# EAGLE board luxo (EAGLE 7.3.0)
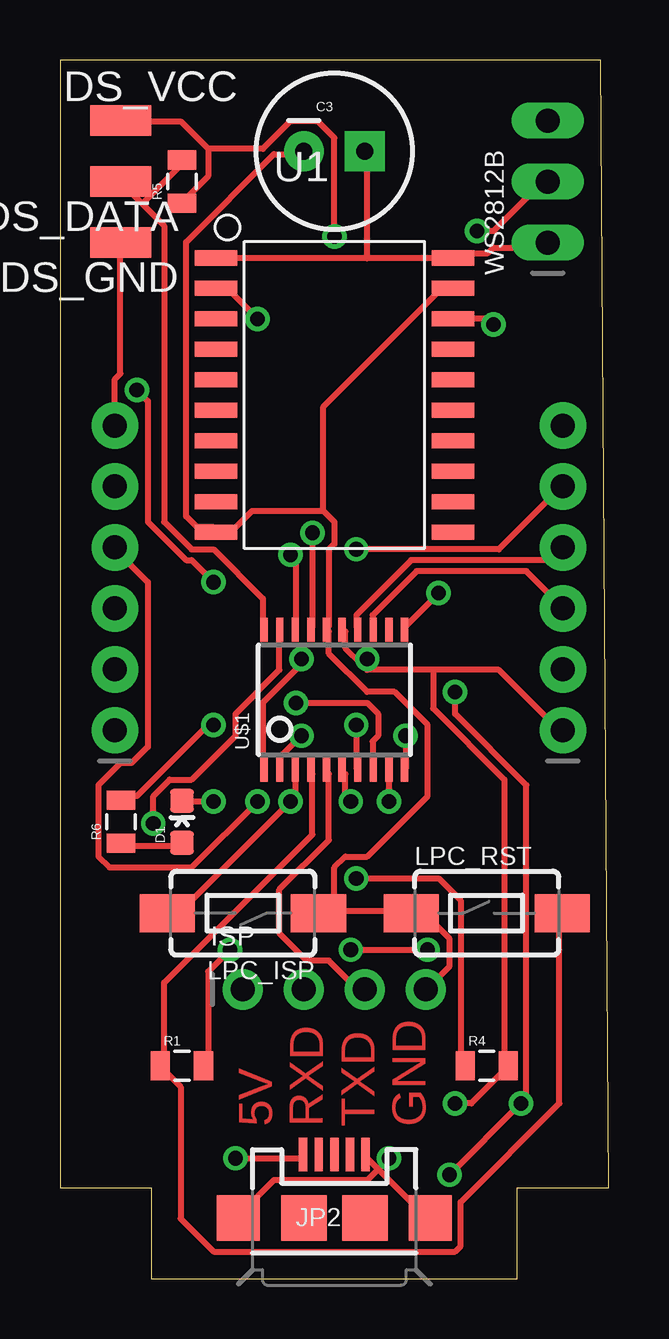
[diagram p0: board, top side]
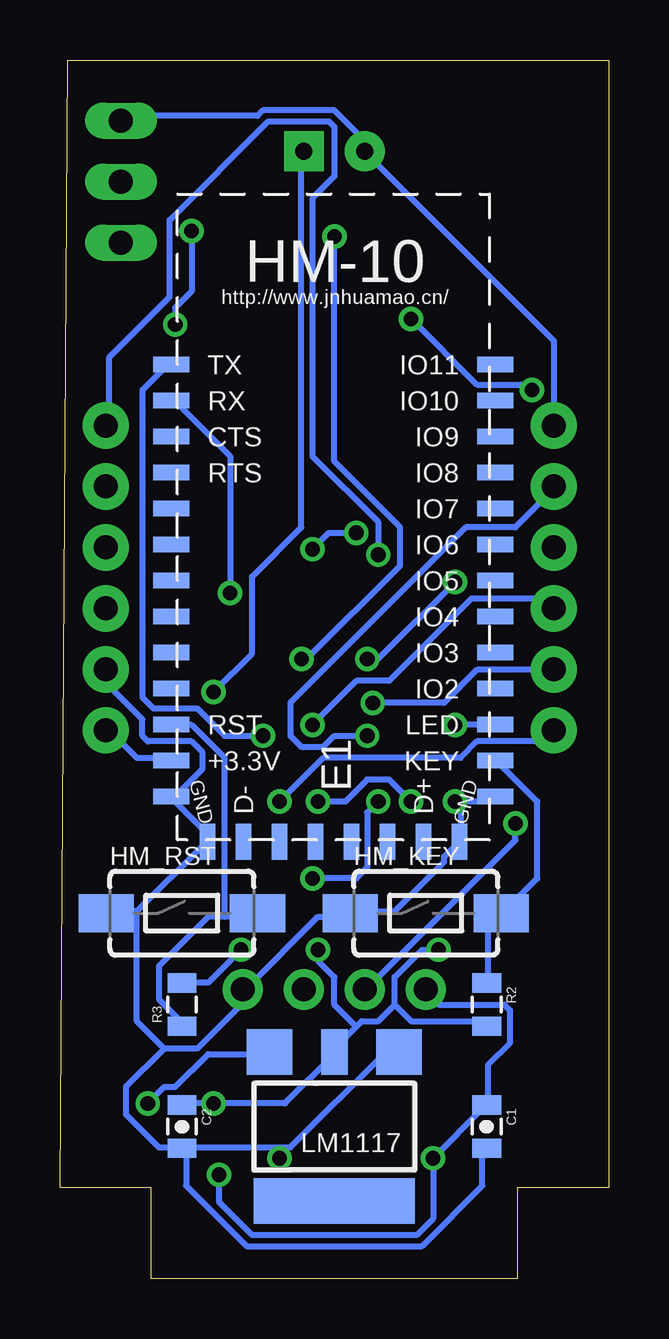
[diagram p1: board, bottom side, seen from below]

Size 22.86 x 50.79 mm. Coordinates in mm from the lower left corner, seen from the top.
Outline: 0,3.81 3.81,3.81 3.81,0 19.05,0 19.05,3.81 22.86,3.81 22.53,50.79 0,50.79 0,3.81
Copper layers (1*16): Top 0.035mm / dielectric 1.5mm / Bottom 0.035mm
Design rules "default": minimum track width 10mil, minimum drill 24mil, track to track 8mil, track to pad 8mil, pad to pad 8mil, via to via 8mil, smd to smd 8mil, copper to edge 40mil, drill to drill 8mil, minimum pad ring 10mil, minimum via ring 8mil, stop-mask expansion 4mil, vias tented up to drill 0mil, thermal gap 10mil

## Footprints (pad centres in the part's own frame; a part is rotated, then mirrored left to right if it is on the bottom)
0805-CAP = smd 0.8 x 1.2: 1 -0.9,0; 2 0.9,0
CPOL-RADIAL-100UF-25V = drill 0.7 pad 1.651 square: 1 1.27,0 | drill 0.7 pad 1.651: 2 -1.27,0
LED-0603 = smd 1 x 1: A 0,-0.877; C 0,0.877
SMD1,27-2,54 = smd 1.27 x 2.54: 1 0,0
26.9X13X2.2_BOARD = smd 1.5 x 0.635: 1 -7.5,0; 2 -7.5,-1.5; 3 -7.5,-3; 4 -7.5,-4.5; 5 -7.5,-6; 6 -7.5,-7.5; 8 -7.5,-10.5; 9 -7.5,-12; 10 -7.5,-13.5; 11 -7.5,-15; 12 -7.5,-16.5; 13 -7.5,-18; 22 6,-18; 23 6,-16.5; 24 6,-15; 25 6,-13.5; 26 6,-12; 27 6,-10.5; 28 6,-9; 29 6,-7.5; 30 6,-6; 31 6,-4.5; 32 6,-3; 33 6,-1.5; 34 6,0; $7 -7.5,-9 | smd 0.635 x 1.5: 14 -6,-19.875; 15 -4.5,-19.875; 16 -3,-19.875; 17 -1.5,-19.875; 18 0,-19.875; 19 1.5,-19.875; 20 3,-19.875; 21 4.5,-19.875
TACTILE-SWITCH-1101NE = smd 2.3 x 1.6: 1 -3.15,0; 2 3.15,0
1X04_ROUND = drill 1 pad 1.676: 1 -3.81,0; 2 -1.27,0; 3 1.27,0; 4 3.81,0
USB-MICROB = smd 0.35 x 1.4: D+ 0,2.65; D- -0.65,2.65; GND 1.3,2.65; ID 0.65,2.65; VBUS -1.3,2.65 | smd 1.8 x 1.9: MT1 -4,0; MT2 4,0 | smd 1.9 x 1.9: P$1 -1.27,0; P$2 1.27,0
1X06_ROUND_76 = drill 1 pad 1.93: 1 -6.35,0; 2 -3.81,0; 3 -1.27,0; 4 1.27,0; 5 3.81,0; 6 6.35,0
SOT223-W = smd 1.9 x 1.9: 1 -2.7,-3.1; 3 2.7,-3.1 | smd 1.1 x 1.9: 2 0,-3.1 | smd 6.7 x 1.9: 4 0,3.1
0805 = smd 0.8 x 1.2: 1 -0.9,0; 2 0.9,0
SOP20-10.65 = smd 0.635 x 1.77: 1 -5.715,-4.94; 2 -4.445,-4.94; 3 -3.175,-4.94; 4 -1.905,-4.94; 5 -0.635,-4.94; 6 0.635,-4.94; 7 1.905,-4.94; 8 3.175,-4.94; 9 4.445,-4.94; 10 5.715,-4.94; 11 5.715,4.94; 12 4.445,4.94; 13 3.175,4.94; 14 1.905,4.94; 15 0.635,4.94; 16 -0.635,4.94; 17 -1.905,4.94; 18 -3.175,4.94; 19 -4.445,4.94; 20 -5.715,4.94
TSSOP20 = smd 0.305 x 0.991: 1 -2.925,-2.918; 2 -2.275,-2.918; 3 -1.625,-2.918; 4 -0.975,-2.918; 5 -0.325,-2.918; 6 0.325,-2.918; 7 0.975,-2.918; 8 1.625,-2.918; 9 2.275,-2.918; 10 2.925,-2.918; 11 2.925,2.918; 12 2.275,2.918; 13 1.625,2.918; 14 0.975,2.918; 15 0.325,2.918; 16 -0.325,2.918; 17 -0.975,2.918; 18 -1.625,2.918; 19 -2.275,2.918; 20 -2.925,2.918
1X03_OVAL = drill 1 long: 1 -2.54,0; 2 0,0; 3 2.54,0

## Placement (x,y rotation side)
C1  10uf  [0805-CAP]  5.08,6.35 270 bottom
C2  10uf  [0805-CAP]  17.78,6.35 270 bottom
C3  100uf  [CPOL-RADIAL-100UF-25V]  11.43,46.99 0 top
D1  BLUE  [LED-0603]  5.08,19.05 0 top
DS_DATA  [SMD1,27-2,54]  2.54,45.72 90 top
DS_GND  [SMD1,27-2,54]  2.54,43.18 90 top
DS_VCC  [SMD1,27-2,54]  2.54,48.26 270 top
E1  HM-10-BOARD  [26.9X13X2.2_BOARD]  10.72,38.1 0 bottom
HM_KEY  SWITCH-MOMENTARY-2SMD-1101NE  [TACTILE-SWITCH-1101NE]  7.62,15.24 0 bottom
HM_RST  SWITCH-MOMENTARY-2SMD-1101NE  [TACTILE-SWITCH-1101NE]  17.78,15.24 0 bottom
ISP  ISP Header  [1X04_ROUND]  11.43,12.06 0 top
JP2  USB-MICROB  [USB-MICROB]  11.43,2.54 0 top
LEFT_BANK  [1X06_ROUND_76]  2.29,29.21 90 top
LM1117  3.3V  [SOT223-W]  11.43,6.35 180 bottom
LPC_ISP  SWITCH-MOMENTARY-2SMD-1101NE  [TACTILE-SWITCH-1101NE]  7.62,15.24 180 top
LPC_RST  SWITCH-MOMENTARY-2SMD-1101NE  [TACTILE-SWITCH-1101NE]  17.78,15.24 0 top
R1  10k  [0805]  5.08,8.89 0 top
R2  1k  [0805]  5.08,11.43 270 bottom
R3  1k  [0805]  17.78,11.43 90 bottom
R4  50k  [0805]  17.78,8.89 0 top
R5  4.7k  [0805]  5.08,45.72 90 top
R6  470  [0805]  2.54,19.05 90 top
RIGHT_BANK  [1X06_ROUND_76]  20.95,29.21 90 top
U1  74HCT245  [SOP20-10.65]  11.43,36.83 270 top
U$1  LPC812M101JDH20  [TSSOP20]  11.43,24.13 0 top
WS2812B  WS2812B  [1X03_OVAL]  20.32,45.72 90 top

## Library data of the parts
C1 C2 = SparkFun-Capacitors; PROD_ID: CAP-11330
C3 = SparkFun-Capacitors; PROD_ID: CAP-08439
D1 = SparkFun-LED; PROD_ID: DIO-08575
DS_DATA DS_GND DS_VCC = wirepad
E1 = JNHuaMao
HM_KEY HM_RST LPC_ISP LPC_RST = SparkFun-Electromechanical; PROD_ID: SWCH-00815
ISP LEFT_BANK LM1117 RIGHT_BANK WS2812B = microbuilder
JP2 = SparkFun-Connectors; PROD_ID: CONN-09505
R1-R6 = SparkFun-Resistors
U1 = TFT Touch
U$1 = LPC800

## Nets
3.3V: C2.1 DS_VCC.1 E1.12 LM1117.2 R1.2 R2.2 R3.2 R4.2 R5.1 RIGHT_BANK.1 U$1.15
5V: C1.1 C3.1 ISP.1 JP2.VBUS LM1117.3 U1.1 U1.20 WS2812B.1
DS_DATA: DS_DATA.1 R5.2 U$1.20
GND: C1.2 C2.2 C3.2 D1.C DS_GND.1 E1.13 E1.14 E1.21 E1.22 HM_KEY.1 HM_RST.1 ISP.4 JP2.GND JP2.MT1 JP2.MT2 LEFT_BANK.6 LM1117.1 LPC_ISP.1 LPC_RST.1 RIGHT_BANK.2 U1.10 U1.19 U$1.16 WS2812B.3
HM_LED: E1.24 R6.2
HM_RST: E1.11 HM_RST.2 R3.1
HM_RX: E1.2 U$1.11
HM_TX: E1.1 U$1.10
ISP_PN: LPC_ISP.2 R4.1 U$1.3
KEY: E1.23 HM_KEY.2 R2.1
N$2: D1.A R6.1
P2: LEFT_BANK.5 U$1.2
P5: ISP.3 U$1.5
P6: LEFT_BANK.4 U$1.6
P7: LEFT_BANK.3 U$1.7
P8: LEFT_BANK.2 U$1.8
P9: LEFT_BANK.1 U$1.9
P12: U$1.12
P13: RIGHT_BANK.3 U$1.13
P14: RIGHT_BANK.4 U$1.14
P17: RIGHT_BANK.5 U$1.17
P18: RIGHT_BANK.6 U$1.18
P19: ISP.2 U$1.19
RESET: LPC_RST.2 R1.1 U$1.4
WS_RX: U1.18 WS2812B.2
WS_TX: U1.2 U$1.1

## Tracks (layer width: path | path; a pad name or v marks a point on that pad's centre or on a via)
3.3V  (via drill 0.61)
  Top 0.254: v7.09,13.72 6.17,12.8 6.17,8.91 R1.2 | v12.12,13.72 v15.32,13.72 | 6.17,47.09 6.17,45.95 5.26,45.03 R5.1 | 6.17,47.09 5.03,48.23 2.74,48.23 DS_VCC.1 | 12.57,25.6 12.8,25.38 15.54,25.38 | 12.57,25.6 11.89,26.29 11.89,26.98 U$1.15 | 15.54,25.38 18.29,25.38 20.8,22.86 RIGHT_BANK.1 | 15.54,25.38 15.54,23.77 18.52,20.8 18.52,8.91 R4.2 18.52,8.69 17.14,7.32 v16.46,7.32 | 6.17,47.09 8.46,47.09 9.6,48.23 10.74,48.23 11.43,47.55 v11.43,43.43 | 12.57,25.6 v12.8,25.83
  Bottom 0.254: C2.1 17.6,7.32 v16.46,7.32 13.49,7.32 11.43,9.37 LM1117.2 11.43,9.6 10.52,10.52 | v7.09,13.72 7.77,13.72 8.91,12.57 8.91,11.43 | 8.91,11.43 9.6,10.74 10.29,10.74 10.52,10.52 | 8.91,11.43 8.23,10.74 5.26,10.74 R2.2 | v15.32,13.72 16.69,12.34 17.6,12.34 R3.2 | v12.12,13.72 12.12,13.26 11.43,12.57 11.43,11.43 10.52,10.52 | E1.12 18.29,21.72 19.66,21.72 20.8,22.86 RIGHT_BANK.1 | v11.43,43.43 11.43,34.06 8.69,31.32 8.69,29.72 12.57,25.83 v12.8,25.83
5V  (via drill 0.61)
  Top 0.254: 12.8,42.52 16.23,42.52 U1.20 16.46,42.75 17.83,42.75 18.06,42.98 20.12,42.98 WS2812B.1 | 12.8,42.52 6.63,42.52 U1.1 | 12.8,42.52 12.8,46.86 C3.1 | v7.32,5.03 10.06,5.03 JP2.VBUS | v16.23,4.34 v19.2,7.32 19.43,7.54 19.43,20.57 16.46,23.55 v16.46,24.46
  Bottom 0.254: ISP.1 7.54,11.89 7.09,11.43 4.34,11.43 4.12,11.2 4.12,9.83 5.03,8.91 5.03,7.32 C1.1 5.26,7.09 v7.32,5.03 7.32,2.52 8,1.83 14.86,1.83 16.23,3.2 v16.23,4.34 | v19.2,7.32 18.52,8 18.06,8 16.69,9.37 14.17,9.37 LM1117.3 | v16.46,24.46 14.86,26.06 14.86,29.26 12.8,31.32 12.8,46.86 C3.1
DS_DATA
  Top 0.254: 3.43,44.81 2.52,45.72 DS_DATA.1 | 3.43,44.81 4.34,43.89 4.34,31.55 5.49,30.4 6.4,30.4 8.46,28.35 8.46,27.2 U$1.20 | 3.43,44.81 5.03,46.41 R5.2
GND  (via drill 0.61)
  Top 0.254: LEFT_BANK.6 2.29,37.49 2.52,37.72 2.52,42.98 DS_GND.1 | 10.97,32 11.43,31.55 11.43,30.63 11.2,30.4 11.2,27.2 U$1.16 11.2,26.98 11.2,26.06 12.8,24.46 13.95,24.46 15.32,23.09 15.32,20.12 12.8,17.6 11.89,17.6 11.43,17.14 11.43,15.32 | 10.97,32 8,32 7.32,31.32 6.63,31.32 U1.10 6.4,31.32 5.71,31.32 5.26,31.77 5.26,43.2 8.91,46.86 10.06,46.86 C3.2 | 10.97,32 10.97,36.35 15.77,41.15 16.23,41.15 U1.19 | 13.26,4.57 15.32,2.52 JP2.MT2 | 13.26,4.57 12.8,5.03 JP2.GND | 13.26,4.57 12.8,4.12 8.91,4.12 7.54,2.74 JP2.MT1 | v13.72,5.03 13.26,4.57 | 11.43,15.32 14.4,15.32 LPC_RST.1 14.63,15.09 15.32,15.09 16.23,14.17 16.23,13.03 15.32,12.12 ISP.4 | 11.43,15.32 10.97,15.32 HM_KEY.1 11.43,15.32 | v6.4,19.89 5.26,19.89 D1.C
  Bottom 0.254: WS2812B.3 20.12,48.46 14.63,48.46 14.4,48.69 11.43,48.69 10.29,47.55 10.29,47.09 C3.2 10.06,46.86 2.29,39.09 LEFT_BANK.6 | C1.2 5.26,5.26 5.26,3.89 7.77,1.37 15.09,1.37 17.6,3.89 17.6,5.26 C2.2 | 13.72,5.49 17.6,5.49 C2.2 | 13.72,5.49 13.26,5.49 9.37,9.37 8.91,9.37 LM1117.1 | 13.72,5.49 v13.72,5.03 | 19.66,15.32 20.8,15.32 HM_RST.1 | 19.66,15.32 16.92,18.06 E1.14 16.92,18.29 16.92,18.75 18.06,19.89 E1.13 18.06,20.12 16.92,21.26 16.92,21.95 17.37,22.4 19.2,22.4 19.43,22.63 19.43,23.32 20.8,24.69 20.8,25.38 RIGHT_BANK.2 | 6.17,19.89 4.8,19.89 E1.22 | 6.17,19.89 6.17,18.29 E1.21 6.4,18.06 6.86,17.6 6.86,17.37 8.91,15.32 10.74,15.32 HM_KEY.1 10.97,15.09 12.12,15.09 15.09,12.12 ISP.4 15.32,11.89 15.32,11.43 17.14,9.6 18.52,9.6 | 6.17,19.89 v6.4,19.89 | 19.66,15.32 19.66,10.74 18.52,9.6 | 18.52,9.6 20.12,8 20.12,6.86 18.75,5.49 17.83,5.49 C2.2
HM_LED  (via drill 0.61)
  Top 0.254: v6.4,23.09 6.17,23.09 3.2,20.12 2.74,20.12 R6.2
  Bottom 0.254: v6.4,23.09 4.8,23.09 E1.24
HM_RST
  Bottom 0.254: 16,15.09 14.63,15.09 HM_RST.2 | 16,15.09 16.69,15.09 18.75,13.03 18.75,11.66 17.83,10.74 R3.1 | 16,15.09 16,21.72 17.37,23.09 18.06,23.09 E1.11
HM_RX  (via drill 0.61)
  Top 0.254: v15.77,28.57 14.4,27.2 U$1.11
  Bottom 0.254: v15.77,28.57 15.77,34.29 18.06,36.58 E1.2
HM_TX  (via drill 0.61)
  Top 0.254: v14.4,22.63 14.4,21.26 U$1.10
  Bottom 0.254: v14.4,22.63 16,22.63 17.14,23.77 18.97,23.77 19.43,24.23 19.43,37.03 18.29,38.18 E1.1
ISP_PN  (via drill 0.61)
  Top 0.254: U$1.3 9.83,21.03 9.83,20.12 v9.6,19.89 5.03,15.32 4.57,15.32 LPC_ISP.2 | v12.34,16.69 15.77,16.69 16.69,15.77 16.69,8.91 R4.1
  Bottom 0.254: v12.34,16.69 10.52,16.69 10.06,17.14 10.06,19.43 v9.6,19.89
KEY
  Bottom 0.254: R2.1 5.03,12.34 5.03,14.63 4.57,15.09 HM_KEY.2 4.34,15.32 2.97,16.69 2.97,19.89 4.57,21.49 E1.23
N$2
  Top 0.254: D1.A 5.03,18.06 2.74,18.06 R6.1
P2  (via drill 0.61)
  Top 0.254: v10.06,22.63 9.14,21.72 9.14,21.26 U$1.2
  Bottom 0.254: v10.06,22.63 11.43,22.63 11.89,22.17 12.8,22.17 13.26,22.63 13.26,24 5.94,31.32 3.89,31.32 2.29,32.92 LEFT_BANK.5
P5
  Top 0.254: U$1.5 11.2,21.03 11.2,18.29 9.14,16.23 9.14,14.4 10.29,13.26 11.2,13.26 12.57,11.89 ISP.3
P6  (via drill 0.61)
  Top 0.254: v12.12,19.89 11.89,20.12 11.89,21.03 U$1.6 | v8.23,19.89 5.49,17.14 2.06,17.14 1.6,17.6 1.6,20.57 2.52,21.49 2.97,21.49 3.66,22.17 3.66,29.03 2.29,30.4 LEFT_BANK.4
  Bottom 0.254: v12.12,19.89 10.97,19.89 10.06,20.8 9.14,20.8 v8.23,19.89
P7  (via drill 0.61)
  Top 0.254: v12.34,23.09 12.34,21.26 U$1.7
  Bottom 0.254: v12.34,23.09 10.52,24.92 9.14,24.92 5.71,28.35 2.52,28.35 2.29,28.12 LEFT_BANK.3
P8  (via drill 0.61)
  Top 0.254: v9.83,24 12.8,24 13.26,23.55 13.26,22.63 13.03,22.4 13.03,21.26 U$1.8
  Bottom 0.254: v9.83,24 6.86,24 5.49,25.38 2.29,25.38 LEFT_BANK.2
P9  (via drill 0.61)
  Top 0.254: v13.72,19.89 13.72,21.03 U$1.9
  Bottom 0.254: v13.72,19.89 11.89,21.72 6.17,21.72 5.49,22.4 2.74,22.4 LEFT_BANK.1
P13
  Top 0.254: U$1.13 13.03,27.2 13.03,27.66 14.86,29.49 19.43,29.49 20.8,28.12 RIGHT_BANK.3
P14
  Top 0.254: U$1.14 12.34,27.2 12.34,27.66 14.63,29.95 20.34,29.95 20.8,30.4 RIGHT_BANK.4
P17  (via drill 0.61)
  Top 0.254: v10.52,31.09 10.52,27.2 U$1.17 | v12.34,30.4 18.29,30.4 20.8,32.92 RIGHT_BANK.5
  Bottom 0.254: v10.52,31.09 11.66,31.09 v12.34,30.4
P18  (via drill 0.61)
  Top 0.254: v9.6,30.18 9.83,29.95 9.83,27.2 U$1.18
  Bottom 0.254: v9.6,30.18 9.6,31.55 12.34,34.29 12.34,45.03 11.43,45.95 11.43,48.01 11.66,48.23 14.17,48.23 18.29,44.12 18.29,40.92 20.8,38.41 20.8,35.66 RIGHT_BANK.6
P19  (via drill 0.61)
  Top 0.254: v3.89,18.97 3.89,20.12 4.57,20.8 5.49,20.8 7.32,22.63 7.32,23.55 9.14,25.38 9.14,26.98 U$1.19
  Bottom 0.254: v3.89,18.97 3.89,18.29 10.06,12.12 ISP.2
RESET
  Top 0.254: U$1.4 10.52,21.03 10.52,18.52 4.34,12.34 4.34,8.91 R1.1 4.34,8.69 5.03,8 5.03,2.52 6.4,1.14 16.46,1.14 16.69,1.37 16.69,3.2 20.8,7.32 20.8,15.09 LPC_RST.2
WS_RX  (via drill 0.61)
  Top 0.254: U1.18 17.83,40.01 v18.06,39.78 | v17.37,43.66 18.06,43.66 20.12,45.72 WS2812B.2
  Bottom 0.254: v18.06,39.78 18.06,40.46 17.37,41.15 v17.37,43.66
WS_TX  (via drill 0.61)
  Top 0.254: v10.06,25.83 10.06,25.6 8.46,24 8.46,21.26 U$1.1 | v6.4,29.03 5.49,29.95 5.26,29.95 3.66,31.55 3.66,36.58 v3.2,37.03 | v8.23,40.01 7.09,41.15 6.63,41.15 U1.2
  Bottom 0.254: v10.06,25.83 9.6,25.83 v6.4,29.03 | v3.2,37.03 3.43,37.03 3.66,37.26 5.49,37.26 v8.23,40.01

## Text on the board
Top: 5V / RXD / TXD / GND